# Altium PCB MAIN.PcbDoc
Units mm, origin at the board's own origin, x right, y up, seen from the top; angles counter-clockwise.
Board outline 53.09 x 22 mm, 2 copper layers (Top Layer, Bottom Layer), stack 1.571 mm thick; 17 components, 19 nets, 85 pads, 11 vias.
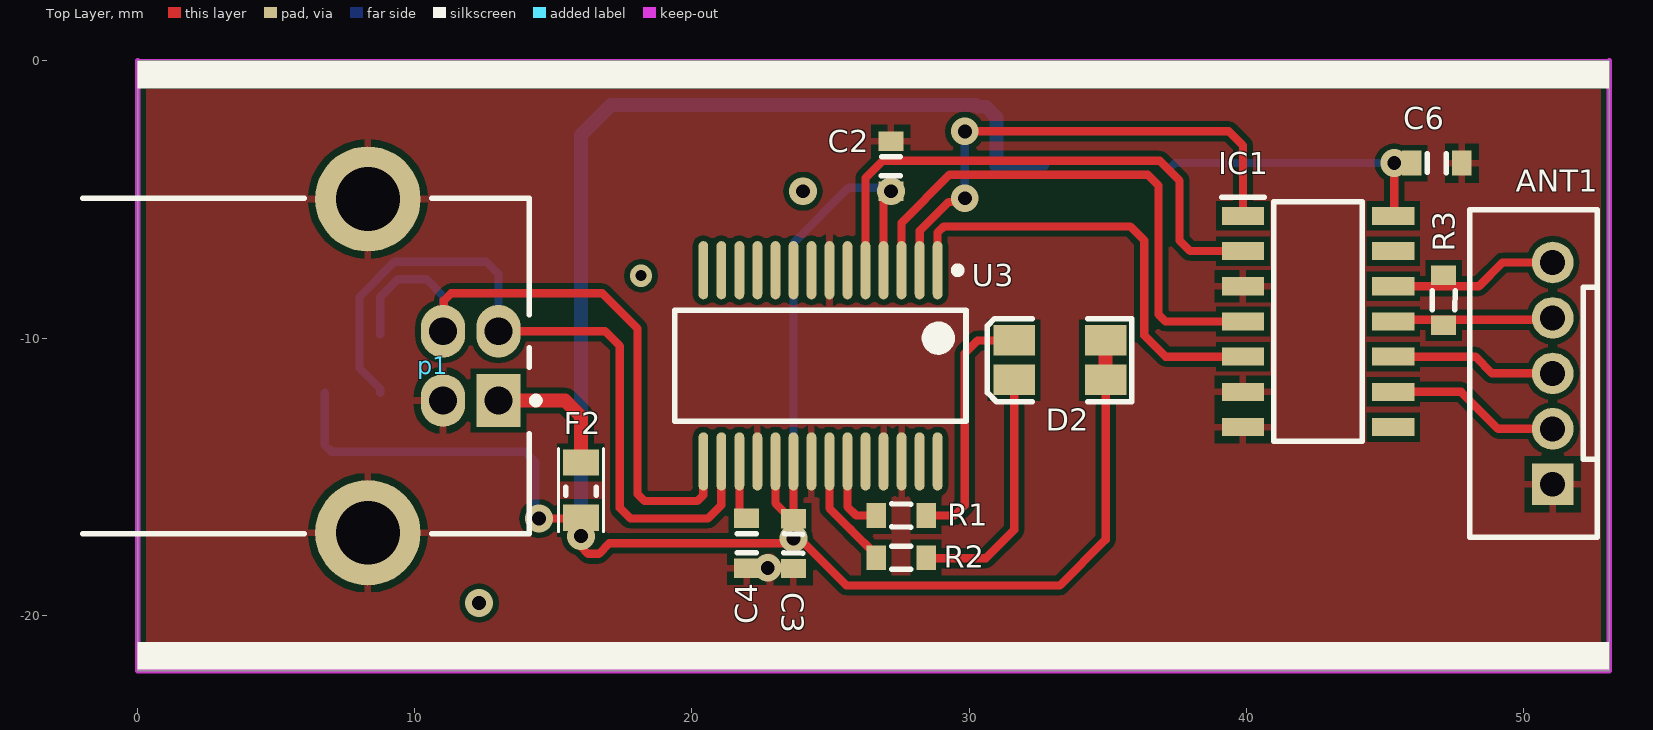
[diagram p0: Top Layer view]
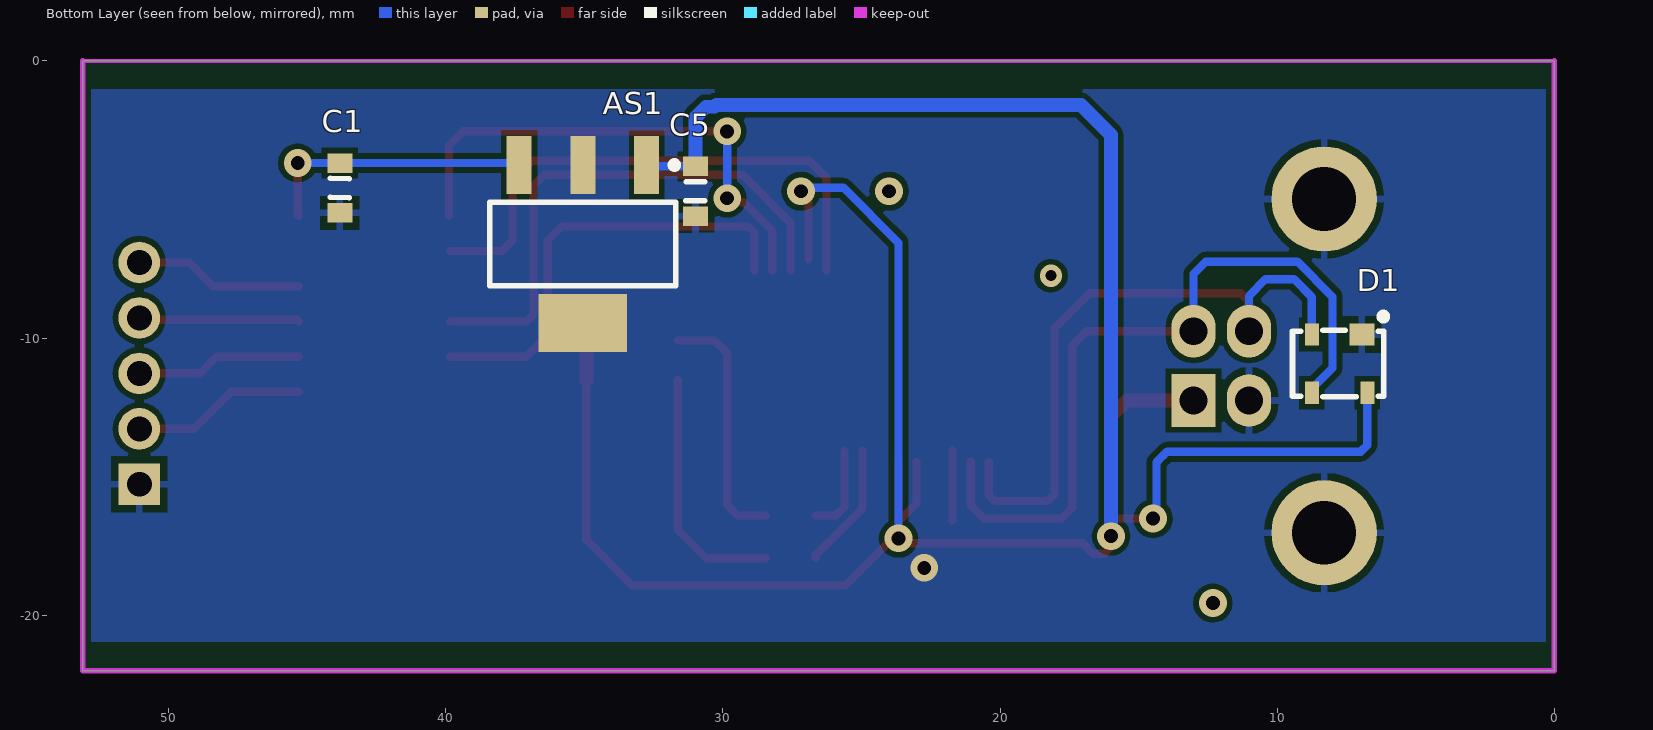
[diagram p1: Bottom Layer view, seen from below]
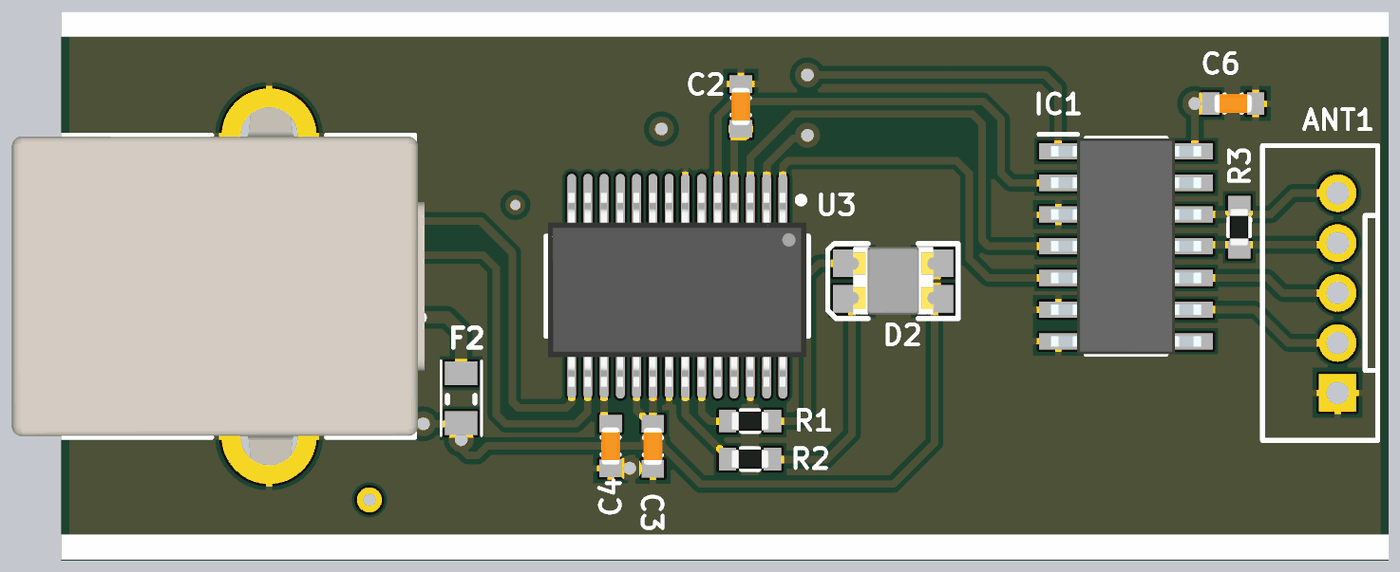
[diagram p2: 3D render of the assembled board from above, using the file's embedded part models]
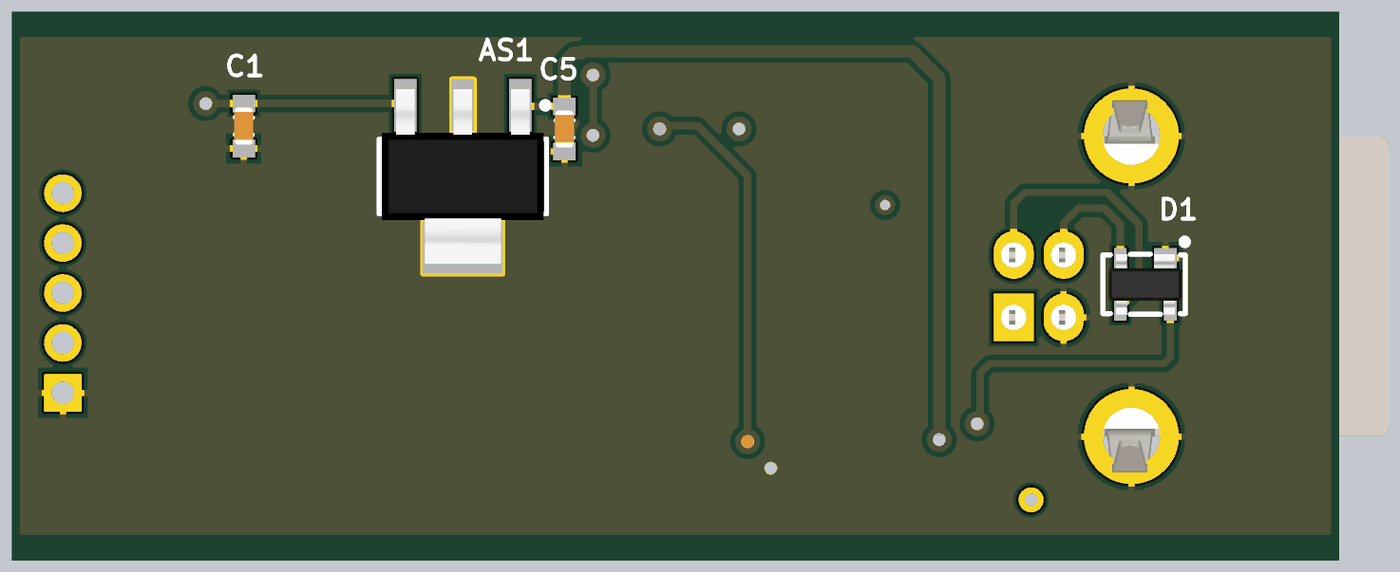
[diagram p3: 3D render of the assembled board from below, using the file's embedded part models]

## Layer stack, top to bottom
Top Solder: solder mask 0.0102, Solder Resist, Dk 3.5
Top Layer: signal copper 0.0356
Dielectric 1: dielectric 1.5, FR-4, Dk 4.8
Bottom Layer: signal copper 0.0356
Bottom Solder: solder mask 0.0102, Solder Resist, Dk 3.5

## Board outline
0,-22 53.086,-22 53.086,0 0,0

## Design rules (kind name [scope] priority, off if disabled: settings)
Clearance [All] p1: gap=0.2 ignorepadtopadclearanceinfootprint=FALSE
PolygonConnect PolygonConnect_1 [HasFootprint('SOT-223')  OR IsVia] p1: connectstyle=Direct reliefconductorwidth=0.254 reliefentries=4 polygonreliefangle="90 Angle" airgapwidth=0.254
PolygonConnect [All] p2: connectstyle=Relief reliefconductorwidth=0.254 reliefentries=4 polygonreliefangle="90 Angle" airgapwidth=0.254
RoutingVias [All] p1: holewidth=0.5 width=1 viastyle="Through Hole" minholewidth=0.5 minwidth=1 maxholewidth=5 maxwidth=1
SolderMaskExpansion [All] p1: expansion=0.102 istentingtop=FALSE
Width [All] p1: maxlimit=1 minlimit=0.2 preferedwidth=0.3
30 further rules are at their usual default settings.

## Components (designator, comment, footprint, x,y, rotation, side; value= is the part's Value field where it differs from the comment)
ANT1 "CONN-5" PH-5 51.054,-13.271 r90 top
AS1 "AS1129IMP-3.3" SOT-223 35.052,-6.604 r0 bottom
C1 "100nF" C603 43.815,-4.583 r90 bottom
C2 "100nF" c603 27.178,-3.799 r270 top
C3 "100nF" c603 23.661,-17.41 r90 top
C4 "100nF" c603 21.971,-17.399 r90 top
C5 "10u" C603 30.988,-4.699 r90 bottom
C6 "10u" C603 46.874,-3.683 r180 top
D1 "PRTR5V0U2X" SOT-143B 7.747,-10.922 r0 bottom
D2 "LED-RG" LED-1210 33.274,-10.795 r180 top
F2 "Fuse 1" PTC-0805 16.002,-15.494 r90 top
IC1 "MAX3079EESD+T" SOIC127P600X175-14N 42.59,-9.398 r0 top
p1 "USB Connector" USB2-B-R -1.993,-11 r180 top
R1 "330" R0603 27.548,-16.399 r0 top
R2 "330" R0603 27.548,-17.923 r0 top
R3 "120" R0603 47.117,-8.636 r90 top
U3 "FT232RL" SSOP-28N 24.636,-11 r270 top

## Footprints (in the part's own frame and the unit in brackets; to place one, negate y for a bottom-side part, rotate by r counter-clockwise, add the part's x,y. Pads: shape width x height; smd on the part's side, far side on the other; paste and mask are expansions set on the pad)
C603 [mm]
  rect 0.7x0.9 smd: 1(-0.9,0) 2(0.9,0)
  silkscreen extent -0.35,-0.34 0.35,0.34, body extent -0.76,-0.38 0.76,0.38, height 0.6
c603 [mm]
  rect 0.7x0.9 smd: 1(-0.9,0) 2(0.9,0)
  silkscreen extent -0.35,-0.34 0.35,0.34, body extent -0.76,-0.38 0.76,0.38, height 0.6
LED-1210 [mm]
  rect 1.5x1.1 smd: 1(-1.651,0.713) 2(-1.651,-0.713) 3(1.651,-0.713) 4(1.651,0.713)
  silkscreen extent -2.6,-1.5 2.62,1.5, body extent -1.62,-1.36 1.62,1.34, height 1.1
PH-5 [mm]
  rect 1.5x1.5 hole 0.9: 1(-2,0)
  round 1.5 hole 0.9: 2(0,0) 3(2,0) 4(4,0) 5(6,0)
  silkscreen extent -3.91,-1.6 7.9,3, body extent -4,-1.7 8,3.1, height 6
PTC-0805 [mm]
  rect 0.95x1.3 smd: 1(1.008,0.009) 2(-0.992,0.009)
  silkscreen extent -1.49,-0.8 1.51,0.82, body extent -1.07,-0.67 1.07,0.67, height 0.66
R0603 [mm]
  rect 0.7x0.9 smd: 1(-0.9,0) 2(0.9,0)
  silkscreen extent -0.34,-0.42 0.34,0.42, body extent -0.76,-0.38 0.76,0.38, height 0.45
SOIC127P600X175-14N [mm]
  rect 1.525x0.65 smd: 1(-2.712,3.81) 2(-2.712,2.54) 3(-2.712,1.27) 4(-2.712,0) 5(-2.712,-1.27) 6(-2.712,-2.54) 7(-2.712,-3.81) 8(2.712,-3.81) 9(2.712,-2.54) 10(2.712,-1.27) 11(2.712,0) 12(2.712,1.27) 13(2.712,2.54) 14(2.712,3.81)
  silkscreen extent -3.47,-4.33 1.6,4.48, body extent -3,-4.33 3,4.33, height 1.75
SOT-143B [mm]
  rect 0.9x0.8 smd: 1(-0.8,-1.05)
  rect 0.5x0.8 smd: 2(1,-1.05) 3(1,1.05) 4(-1,1.05)
  silkscreen extent -1.7,-1.82 1.7,1.2, body extent -1.46,-1.21 1.46,1.21, height 1
SOT-223 [mm]
  rect 0.9x2.1 smd: 1(-2.3,-2.85) 2(0,-2.85) 3(2.3,-2.85)
  rect 3.2x2.1 smd: 4(0,2.85)
  silkscreen extent -3.42,-2.97 3.35,1.5, body extent -3.24,-3.49 3.24,3.49, height 1.64
SSOP-28N [mm]
  oval 2.1x0.35 smd: 1(-3.45,4.225) 2(-3.45,3.575) 3(-3.45,2.925) 4(-3.45,2.275) 5(-3.45,1.625) 6(-3.45,0.975) 7(-3.45,0.325) 8(-3.45,-0.325) 9(-3.45,-0.975) 10(-3.45,-1.625) 11(-3.45,-2.275) 12(-3.45,-2.925) 13(-3.45,-3.575) 14(-3.45,-4.225) 15(3.45,-4.225) 16(3.45,-3.575) 17(3.45,-2.925) 18(3.45,-2.275) 19(3.45,-1.625) 20(3.45,-0.975) 21(3.45,-0.325) 22(3.45,0.325) 23(3.45,0.975) 24(3.45,1.625) 25(3.45,2.275) 26(3.45,2.925) 27(3.45,3.575) 28(3.45,4.225)
  silkscreen extent -3.57,-5.25 2,5.25, body extent -3.73,-5.17 4.02,5.16, height 2.15
USB2-B-R [mm] "Connector; USB1.1, Type B, Thru-Hole; 4 Position; Right Angle"
  rect 1.6x1.9 hole 1: 1(-15.01,1.25)
  oval 1.6x1.9 hole 1: 2(-15.01,-1.25) 3(-13.01,-1.25) 4(-13.01,1.25)
  round 3.8 hole 2.3: 5(-10.3,6.02) 6(-10.3,-6.02)
  silkscreen extent -16.49,-6.05 -0.02,6.05, body extent -16.51,-7.45 -0.01,7.45, height 10.95

## Part data
AS1: library part AS1129IMP-x.x, "x.x Volt, 800mA Low-Dropout Linear Regulator, 4-pin SOT-223", Manufacturer="National Semiconductor", PackageTopMarking=XYTT*N05B, PartNumber=LM1117IMP-3.3, PowerWise=N, Supplier Part Number 1=7614123, Code_IPC=SOT223-4, Code_JEDEC=TO-261-AA, ComponentLink1Description="LM1117 Datasheet", ComponentLink1URL=http://www.national.com/ds/LM/LM1117.pdf, ComponentLink2Description="LM1117 Web Page", ComponentLink2URL=http://www.national.com/pf/LM/LM1117.html, ComponentLink3Description="MP04A Package Page", ComponentLink3URL=http://www.national.com/packaging/folders/mp04a.html, CompType="LDO IC", DatasheetVersion=Apr-2006, PackageDescription="Molded SOT-223, 6.50 x 3.56 x 1.6mm Body, 4 Lead, 2.3mm Pitch", PackageReference=MP04A, PackageVersion="revB, Apr-2003", PinCount=4, Published=4-Dec-2008, Publisher="Altium Limited", RoHS=N, Supplier 1=Farnell
C1 C2 C3 C4 C5 C6: library part Cap, "Capacitor", Designer="Parsa Malekpour"
D1: "Ultra low capacitance double rail-to-rail ESD protection diode", Reverse Standoff Voltage=5.5V
D2: library part LED-RG-4
F2: "Fuse", LatestRevisionDate=17-Jul-2002, LatestRevisionNote="Re-released for DXP Platform.", PackageDescription="Thru-Hole; 2 Leads", PackageReference=PIN-W2/E2.8, Published=8-Jun-2000, Publisher="Altium Limited"
IC1: "Integrated Circuit", Manufacturer_Name="Analog Devices", Mouser Part Number=700-MAX3079EESDT, Arrow Part Number=MAX3079EESD+T, Arrow Price/Stock=https://www.arrow.com/en/products/max3079eesdt/analog-devices?region=nac, Datasheet Link=https://datasheets.maximintegrated.com/en/ds/MAX3070E-MAX3079E.pdf, Height=1.75mm, Manufacturer_Part_Number=MAX3079EESD+T, Mouser Price/Stock=https://www.mouser.co.uk/ProductDetail/Analog-Devices-Maxim-Integrated/MAX3079EESD%2bT?qs=CDqwynd4ZNoEpjqZ6oN2%252BA%3D%3D
p1: library part USB2-B, "USB Connector-B Type", Adding Date=10/26/2010, Company="DASE Co", Designer="Eng. Saeid Jorablo"
R1 R2 R3: library part Resistor, "Resistor", Designer="Parsa Malekpour"

## Via types
v1: diameter 1, hole 0.5, Top Layer to Bottom Layer, tented both sides, 9 vias
v2: diameter 0.8, hole 0.4, Top Layer to Bottom Layer, tented both sides, 1 vias
v3: diameter 1, hole 0.5, Top Layer to Bottom Layer, 1 vias

## Nets (pads, with @x,y where several pads share a name; then routed paths per layer and width w, separated by ;. In a path a pad name is that pad's centre, name@x,y a point inside that pad or via, vN(x,y) a via of type N, cw(c..) or ccw(c..) an arc to the next point about the centre after c; other vN are vias at no path point)
+3.3V: AS1.3 C1.2 C6.2 IC1.14 | length 9.9
  Top Layer w0.3: IC1.14 45.339,-5.551 v1(45.339,-3.683)
  Bottom Layer w0.3: AS1.3 37.423,-3.683 C1.2 v1(45.339,-3.683)
DTS: IC1.1 U3.2 | length 18.7
  Top Layer w0.3: U3.2 28.221,-7.54 28.221,-6.124 29.258,-5.087 29.711,-5.087 v1(29.845,-4.953) ; v1(29.845,-2.54) 39.37,-2.54 39.878,-3.048 IC1.1
  Bottom Layer w0.3: v1(29.845,-4.953) v1(29.845,-2.54)
GND: ANT1.1 AS1.2 AS1.4 C1.1 C2.1 C3.1 C4.1 C5.1 C6.1 D1.1 IC1.3 IC1.6 IC1.7 p1.4 p1.5 p1.6 U3.7 U3.18 U3.21 U3.25 U3.26 | length 0.1
  Top Layer w0.3: p1.6@9.775,-4.98 p1.6@9.875,-5.08
  other v1: 22.733,-18.288
NetC4_2: C4.2 U3.17 | length 2.5
  Top Layer w0.3: U3.17@21.711,-14.058 U3.17 21.711,-16.557 C4.2@21.731,-16.577
NetD1_2: D1.2 p1.3 U3.15 | length 23.9
  Top Layer w0.3: p1.3 11.049,-9.718 11.049,-8.636 11.303,-8.382 16.764,-8.382 18.034,-9.652 18.034,-15.621 18.288,-15.875 20.193,-15.875 20.411,-15.657 U3.15
  Bottom Layer w0.3: D1.2 8.747,-8.525 9.398,-7.874 10.414,-7.874 11.017,-8.477 p1.3
NetD1_3: D1.3 p1.2 U3.16 | length 27.6
  Top Layer w0.3: p1.2 16.862,-9.75 17.399,-10.287 17.399,-16.129 17.78,-16.51 20.574,-16.51 21.051,-16.033 21.051,-14.46 U3.16
  Bottom Layer w0.3: D1.3 8.747,-11.822 8.001,-11.076 8.001,-8.509 9.271,-7.239 12.573,-7.239 13.017,-7.683 p1.2
NetD2_3: D2.3 R1.2 | length 9
  Top Layer w0.3: R1.2 29.47,-16.399 29.845,-16.024 29.845,-10.541 30.304,-10.082 D2.3
NetD2_4: D2.4 R2.2 | length 9
  Top Layer w0.3: R2.2 28.464,-17.94 30.607,-17.94 31.623,-16.924 D2.4
NetF2_1: F2.1 p1.1 | length 4.9
  Top Layer w0.5: p1.1 15.425,-12.25 15.993,-12.818 F2.1
NetR1_1: R1.1 U3.23 | length 3.2
  Top Layer w0.3: U3.23@25.611,-14.058 U3.23 25.611,-16.084 25.926,-16.399 R1.1
NetR2_1: R2.1 U3.22 | length 4.6
  Top Layer w0.3: U3.22@24.961,-14.058 U3.22 24.961,-16.141 25.719,-16.899 25.724,-16.899 26.648,-17.823 R2.1
RS422_A: ANT1.5 IC1.12 R3.2 | length 5.7
  Top Layer w0.3: IC1.12 48.387,-8.128 49.244,-7.271 ANT1.5@50.673,-7.271
RS422_B: ANT1.4 IC1.11 R3.1 | length 5.4
  Top Layer w0.3: IC1.11 45.366,-9.335 46.99,-9.335 50.609,-9.335 ANT1.4@50.673,-9.271
RS422_Y: ANT1.3 IC1.10 | length 5.6
  Top Layer w0.3: IC1.10 48.26,-10.668 48.863,-11.271 ANT1.3@50.673,-11.271
RS422_Z: ANT1.2 IC1.9 | length 5.9
  Top Layer w0.3: IC1.9 47.752,-11.938 49.085,-13.271 ANT1.2@50.673,-13.271
RTS: IC1.4 U3.3 | length 19.6
  Top Layer w0.3: U3.3 27.561,-5.84 29.298,-4.103 36.439,-4.103 36.83,-4.494 36.83,-9.144 37.084,-9.398 IC1.4@39.833,-9.398
RXD: IC1.2 U3.5 | length 19.7
  Top Layer w0.3: U3.5 26.261,-4.219 26.877,-3.603 36.83,-3.603 ; 36.877,-3.603 37.592,-4.318 37.592,-6.477 37.973,-6.858 IC1.2@39.833,-6.858
TXD: IC1.5 U3.1 | length 16.4
  Top Layer w0.3: U3.1 28.861,-6.191 29.083,-5.969 35.814,-5.969 36.322,-6.477 36.322,-9.906 37.084,-10.668 IC1.5@39.833,-10.668
VUSB: AS1.1 C2.2 C3.2 C5.2 D1.4 D2.1 D2.2 F2.2 U3.4 U3.19 U3.20 | length 98
  Top Layer w0.3: v1(14.478,-16.51) 15.969,-16.51 F2.2 v1(15.993,-17.145) 15.993,-17.517 16.256,-17.78 16.637,-17.78 17.018,-17.399 v1@23.661,-17.399 ; U3.19 23.011,-15.96 23.561,-16.51 C3.2 ; v1(23.661,-17.223) C3.2 ; U3.20 C3.2 ; v1@24.047,-17.399 25.571,-18.923 33.274,-18.923 34.925,-17.272 D2.1 ; U3.4@26.911,-7.158 C2.2@26.911,-4.699
  Top Layer w0.5: D2.1 D2.2
  Bottom Layer w0.3: D1.4 6.747,-13.859 6.985,-14.097 13.97,-14.097 14.096,-14.223 14.351,-14.478 14.351,-16.383 v1(14.478,-16.51) ; v1(23.661,-17.223) 23.661,-6.565 25.654,-4.572 27.051,-4.572 v1(27.178,-4.699) ; C5.2 32.707,-3.799 AS1.1
  Bottom Layer w0.5: v1(15.993,-17.145) 15.993,-2.676 17.079,-1.59 30.239,-1.59 30.3,-1.651 30.607,-1.651 30.988,-2.032 C5.2
pads on no net: IC1.8 IC1.13 U3.6 U3.8 U3.9 U3.10 U3.11 U3.12 U3.13 U3.14 U3.24 U3.27 U3.28
copper on no net:
  other v1: 24.003,-4.699
  other v2: 18.161,-7.747
  other v3: 12.319,-19.558

## Polygon pours and split planes (outlines as drawn)
GND on Bottom Layer "GND_L02_P021" (solid, remove dead copper, pour order 21): 52.959,-1.016 0,-1.016 0,-20.955 52.959,-20.955
GND on Top Layer "GND_L01_P017" (solid, remove dead copper, pour order 17): 53.086,-1.016 0,-1.016 0,-20.955 53.086,-20.955

## Keep-outs
Keep-Out Layer:
  the board outline again, w0.2

## Silkscreen, mask and mechanical layers (free items; w line width, h text height)
Top Overlay:
  rectangle: 0,-1 53.086,0
  rectangle: 0,-21.955 53.086,-20.955

## Text inside footprints (layer, text, board x,y; h text height)
p1: Mechanical 1 "PCB Edge" at -1.668,-5.349 h0.25 r270